# Altium PCB f3.PcbDoc (part 2 of 2)
Units mm, origin at the board's own origin, x right, y up, seen from the top; angles counter-clockwise.
Board outline 43.2 x 39.9 mm, 6 copper layers (Top Layer, layer 2, flex top, flex bottom, layer 5, Bottom Layer), stack 1.565 mm thick; 123 components, 105 nets, 511 pads, 153 vias.
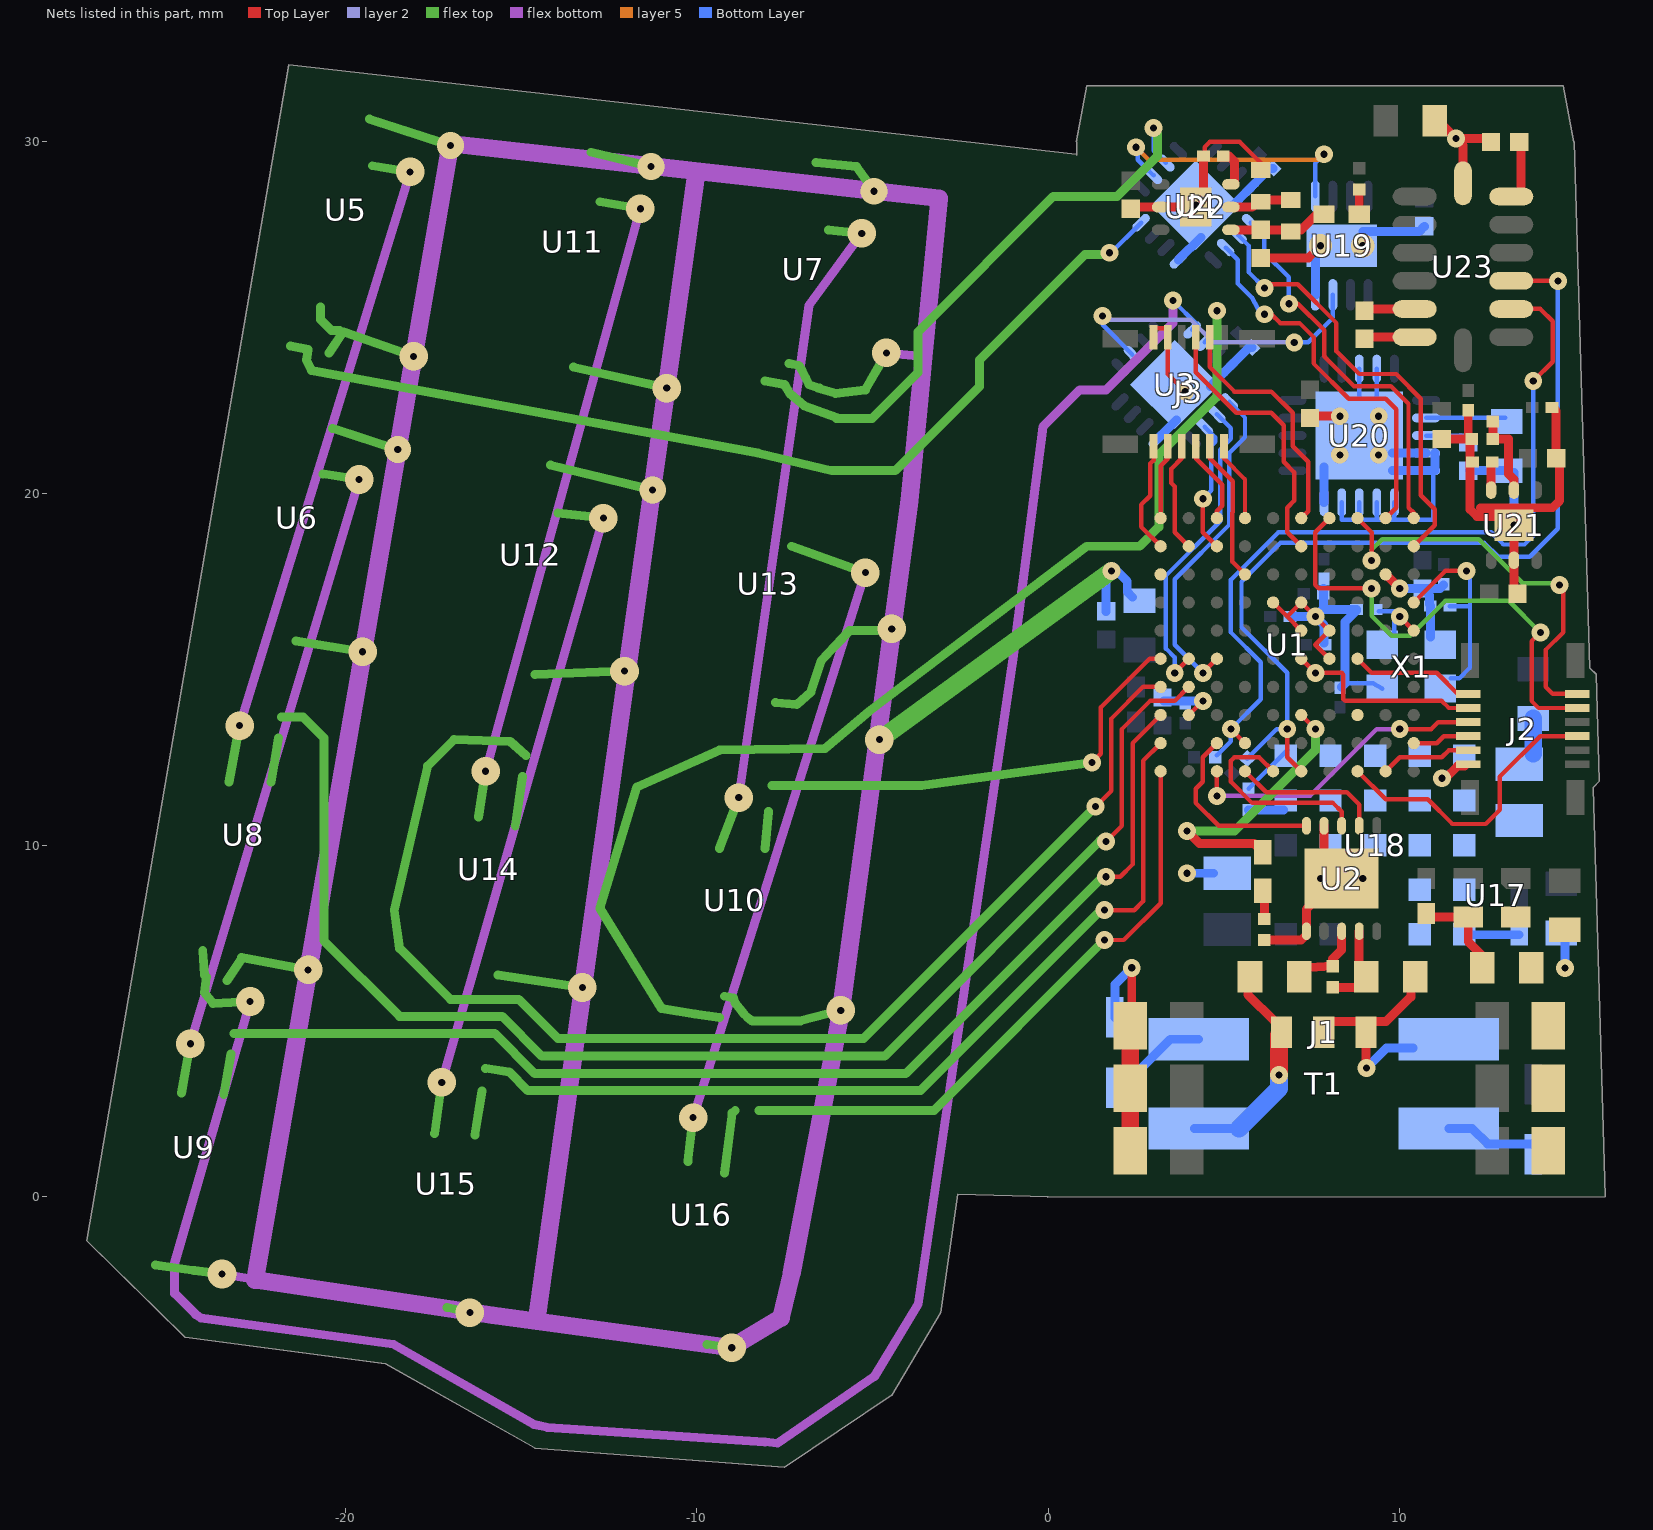
[diagram p6: the nets of this part, all layers, seen from the top]

## Via types
v1: diameter 0.508, hole 0.203, Top Layer to Bottom Layer, tented both sides, 86 vias
v2: diameter 0.813, hole 0.203, Top Layer to Bottom Layer, tented both sides, 51 vias
v3: diameter 0.762, hole 0.203, Top Layer to Bottom Layer, tented both sides, 5 vias
v4: diameter 0.66, hole 0.203, Top Layer to Bottom Layer, tented both sides, 4 vias
v5: diameter 0.5, hole 0.203, Top Layer to Bottom Layer, tented top, 4 vias
v6: diameter 1.016, hole 0.381, Top Layer to Bottom Layer, tented both sides, 2 vias
v7: diameter 0.508, hole 0.203, Top Layer to Bottom Layer, tented bottom, 1 vias

## Nets (pads, with @x,y where several pads share a name; then routed paths per layer and width w, separated by ;. In a path a pad name is that pad's centre, name@x,y a point inside that pad or via, vN(x,y) a via of type N, cw(c..) or ccw(c..) an arc to the next point about the centre after c; other vN are vias at no path point) (continued)
GND: C3.1 C4.1 C5.1 C6.1 C7.1 C8.1 C9.2 C10.2 C11.2 C12.1 C13.1 C14.1 C15.1 C16.1 C17.1 C18.1 C19.1 C20.1 C21.1 C22.1 C23.1 C24.1 C26.1 C27.1 C28.1 C29.2 C30.1 C31.1 C32.1 C33.1 C34.1 C35.1 C36.1 C37.1 C38.1 C39.1 C40.1 C41.1 C42.1 C43.1 C44.1 C45.1 C46.1 C47.1 C50.1 C51.1 C52.1 C53.1 C55.1 D2.1 J2.11 J3.2 J3.4 R1.2 R2.2 R3.2 R5.2 R7.2 R9.2 R10.2 R11.2 R12.2 R14.2 R16.2 R18.2 R20.2 R22.1 R23.1 R28.1 R29.1 R30.1 R31.1 R35.1 U1.B3 U1.D5 U1.D6 U1.E4 U1.E5 U1.F4 U1.J8 U2.4 U2.6 U2.11 U3.1 U3.12 U3.PAD U4.1 U4.12 U4.PAD U17.4 U18.C2 U18.D1 U18.D2 U18.D3 U18.D4 U18.D5 U18.E2 U18.E3 U18.E4 U18.E5 U19.4 U19.9 U20.4 U20.5 U20.6 U20.7 U20.8 U20.9 U20.10 U20.18 U20.19 U20.21 U21.2 U21.7 U22.2 U22.7 U23.7 X1.2 X1.4 | length 258.1
  Top Layer w0.127: J3.2@3,24.45 3,24.7 J3.4@3.4,24.7 ; J3.4@3.4,24.215 3.4,23.4 v1(3.9,22.9) ; U1.J8@4,13.7 v1(4.4,14.1) ; C19.1@4.45,29.65 4.45,29.85 4.6,30 5.45,30 6.05,29.4 R22.1@6.05,29.2 ; U1.F4@6.4,16.9 6.8,16.5 ; U1.E5@7.2,16.1 6.8,16.5 ; U1.D6@8,15.3 7.6,15.7 U1.D5@8,16.1 v1(7.6,16.5) U1.E4@7.2,16.9 6.8,16.5
  Top Layer w0.254: C5.1@2.379,5.239 v1(2.379,6.509) ; C18.1@2.45,28.05 2.55,28.15 U22.2@3.2,28.15 U22.7@4.2,28.15 ; U22.7@4.42,28.47 C19.1@4.42,29.6 ; C20.1@6.05,26.7 7.4,26.7 v4(7.75,27.05) ; R23.1@6.15,7.3 7.2,7.3 U2.6@7.35,7.45 ; U2.6@7.348,7.549 7.348,8.176 U2.11@7.586,8.414 ; C17.1@7.5,22.2 v5(8.3,22.2) ; U2.11@7.848,9.648 U2.4@7.848,10.549 ; U1.B3@9.6,17.7 v1(10,17.3) ; v1(11.2,11.9) 11.3,11.9 11.65,12.25 J2.11@11.85,12.25 ; C53.1@11.2,30.5 v1(11.6,30.1) ; C31.1@11.3,21.55 R35.1@11.95,21.55 ; U23.7@11.8,28.825 11.8,29.9 v1(11.6,30.1) ; C35.1@11.95,22.37 R35.1@11.95,21.55 ; R35.1@12.05,21.55 R35.1@12,21.55 ; 12.304,19.596 14.346,19.596 14.55,19.8 14.55,20.9 C34.1@14.45,21 ; C24.1@12.55,30.1 v1(11.6,30.1) ; U21.7@13,19.35 12.2,19.35 12,19.55 R35.1@12,21.55 ; U21.7@13.25,19.15 v1(13.25,19.1) U21.2@13.25,18.1 13.25,17.25 C32.1@13.35,17.15 ; C26.1@14.33,22.45 14.35,22.45 14.45,22.35 C34.1@14.45,21.05 ; R35.1@11.95,21.55 R35.1@12,21.55
  Top Layer w0.5: C4.1@2.341,1.302 C3.1@2.341,3.08 C5.1@2.341,4.858
  flex bottom w0.254: v2(-23.5,-2.2) -22.6,-2.35 ; v2(-4.6,24) -3.55,23.9
  flex bottom w0.508: -22.56,-2.367 -15.804,-3.374 v2(-9,-4.3) ; -22.55,-2.35 -21.038,6.448 -19.483,15.497 -18.495,21.249 -18.04,23.898 -17.988,24.198 v3@-17.008,29.901 ; v3@-16.994,29.949 -11.298,29.314 -4.949,28.606 -3.1,28.4 -3.541,23.899 -3.688,22.399 -3.942,19.804 -4.4,16.4 -4.762,13.702 -4.876,12.853 -5.891,5.299 -7.3,-2.2 -7.6,-3.45 v2@-8.95,-4.25 ; -14.55,-3.5 -13.233,5.948 -12.042,14.499 -11.98,14.94 -11.261,20.102 -10.857,23.001 -10.85,23.05 -10,29.15
  flex top w0.254: C37.1@-25.397,-1.946 -24.347,-2.093 R7.2@-24.3,-2.1 ; R7.2@-24.281,-2.098 v2(-23.5,-2.2) ; R28.1@-23.354,6.153 R5.2@-22.95,6.75 ; R5.2@-22.947,6.804 v2(-21.05,6.45) ; R2.2@-21.397,15.804 v2(-19.5,15.5) ; C36.1@-20.704,25.303 -20.704,24.954 -20.39,24.64 R1.2@-20.15,24.64 ; R30.1@-20.454,24.003 -20.063,24.581 -20.05,24.6 -20.048,24.6 v2(-18.05,23.9) ; C44.1@-20.354,21.853 v3(-18.5,21.25) ; C43.1@-19.304,30.653 v3(-17,29.9) ; R16.2@-17.1,-3.15 v2(-16.45,-3.3) ; R14.2@-15.65,6.3 v2(-13.25,5.95) ; R11.2@-14.6,14.85 v2(-12.05,14.95) ; C46.1@-14.153,20.808 v3(-11.25,20.1) ; R10.2@-13.501,23.595 v2(-10.85,23) ; C45.1@-13.003,29.708 v3(-11.3,29.3) ; R18.2@-9.7,-4.2 v2(-9,-4.3) ; R29.1@-9.2,5.701 -8.95,5.65 -8.895,5.5 R9.2@-8.65,5.2 ; R9.2@-8.55,5.1 -8.411,4.989 ; -8.4,5 -7.05,5 v2(-5.9,5.3) ; R12.2@-7.75,14.05 -7.15,14 -6.75,14.35 -6.45,15.25 -5.65,16.1 -4.8,16.1 v2(-4.45,16.15) ; R31.1@-7.369,23.698 -7.1,23.65 -7,23.5 -6.9,23.3 -6.8,23.1 R3.2@-6.5,23 ; C47.1@-6.602,29.419 -5.45,29.3 v3(-4.95,28.6) ; R3.2@-6.55,23 -6.05,22.85 -5.2,22.95 v2(-4.6,24)
  flex top w0.508: v2(-4.8,13) v1(1.8,17.8)
  Bottom Layer w0.127: U20.9@8.35,19.75 8.35,19.25 8.85,19.25 ; C40.1@8.45,14.6 9.25,14.6 X1.2@9.5,14.45 ; U20.8@8.85,19.75 8.85,19.25 ; U20.21@8.85,22.7 U20.18@8.85,23.55 ; 9.35,19.3 U20.7@9.35,19.75 ; U20.21@9.35,22.75 U20.19@9.35,23.55 ; 9.85,19.25 U20.6@9.85,19.75 ; U20.5@10.95,20.6 10.95,19.25 8.85,19.25
  Bottom Layer w0.254: C51.1@1.65,16.65 1.65,17.65 v1(1.8,17.8) 1.95,17.8 2.25,17.5 2.25,17.2 C50.1@2.4,17.05 ; D2.1@1.9,5.096 1.9,6.03 v1(2.379,6.509) ; U3.1@3.105,21.544 U3.PAD@3.65,22.089 ; C23.1@3.3,14.1 v1(4.4,14.1) ; U4.1@3.705,26.644 U4.PAD@4.35,27.289 ; v1(3.95,9.2) C9.2@4.7,9.2 ; U3.PAD@4.611,23.05 U3.12@5.156,23.595 5.711,24.15 C14.1@5.8,24.15 ; U4.PAD@5.161,28.1 U4.12@5.756,28.695 6.311,29.25 C15.1@6.4,29.25 ; R20.2@5.7,11 U18.D1@6.7,11 ; C22.1@6.88,16.5 v1(7.6,16.5) 7.85,16.25 C11.2@7.85,15.75 ; U19.4@7.6,25.65 U19.9@7.6,26.9 ; v1@7.65,16.55 7.8,16.7 C28.1@8.77,16.7 8.77,16.67 8.45,16.35 8.45,14.6 C40.1@8.35,14.5 ; 7.83,16.73 C21.1@7.83,17.3 ; U20.10@7.85,19.75 U20.21@7.85,20.75 ; U19.9@8.95,27.45 10.55,27.45 C29.2@10.7,27.6 ; U20.21@9.8,20.65 U20.5@10.75,20.65 11,20.65 U20.4@11,21.15 ; U20.21@9.8,21.15 U20.4@10.75,21.15 ; v1(10,17.3) C38.1@10.65,17.3 ; C27.1@10.85,16.85 10.85,17.1 C38.1@10.65,17.3 ; X1.4@10.87,15.92 C27.1@10.87,16.8 ; C39.1@11.25,17.4 11.15,17.3 C38.1@10.65,17.3 ; C30.1@12,20.65 C16.1@13.05,20.65 ; v1(13.25,19.1) C16.1@13.25,20.6 ; v1(14.7,6.5) C55.1@14.7,7.4
  Bottom Layer w0.508: C10.2@13.8,12.6 C52.1@13.8,13.6
  other v4: 7.748,9.049 8.948,9.049 8.95,27.05
  other v5: 8.3,21.1 9.4,21.1 9.4,22.2
  other v7: 4.2,28.2
I2C_SCL: R33.1 U1.G9 U23.2 | length 23.1
  Top Layer w0.127: v1(5.2,13.3) U1.G9@5.6,12.9 ; U23.2@13.6,25.25 14,25.25 14.35,24.9 14.35,23.75 v1(13.8,23.2)
  Bottom Layer w0.127: R33.1@4.8,12.55 5.2,12.95 v1(5.2,13.3) 6.05,14.15 6.05,15.2 5.2,16.05 5.2,17.55 6.55,18.9 12.6,18.9 12.95,18.55 13.55,18.55 13.8,18.8 v1(13.8,23.2) v1@13.85,23.25
I2C_SDA: R32.1 U1.E10 U23.3 | length 25.6
  Top Layer w0.127: v1(6.8,13.3) 6.8,12.5 U1.E10@7.2,12.1 ; U23.3@13.45,26.05 v1(14.5,26.05)
  Bottom Layer w0.127: R32.1@5.662,12.462 6.5,13.3 v1(6.8,13.3) 6.8,14.9 5.5,16.2 5.5,17.491 6.609,18.6 12.4,18.6 12.8,18.2 13.7,18.2 14.5,19 v1(14.5,26.05)
INPUT_NEG: C2.1 J1.2 J1.3 T1.1 | length 5.9
  Top Layer w0.254: J1.2@7.783,4.985 J1.3@8.983,4.985 ; J1.3@9.04,4.673 9.04,3.658 v1(9.053,3.658) ; J1.3@9.11,4.985 9.618,4.985 10.318,5.685 C2.1@10.318,6.255
  Bottom Layer w0.254: v1(9.053,3.658) 9.618,4.223 T1.1@10.38,4.223
INPUT_POS: C1.1 J1.1 T1.3 | length 6.1
  Top Layer w0.254: C1.1@5.681,6.255 5.681,5.747 6.443,4.985 J1.1@6.57,4.985
  Top Layer w0.508: v1(6.57,3.461) J1.1@6.57,4.603
  Bottom Layer w0.254: T1.3@4.157,1.937 T1.3@4.284,1.937 T1.3@5.427,1.937
  Bottom Layer w0.508: T1.3@5.427,1.937 6.57,3.08 v1(6.57,3.461)
LEDS_0: R4.1 U1.J7 | length 39.1
  Top Layer w0.127: v1(1.65,10.1) 2.1,10.55 2.1,13.3 2.9,14.1 3.6,14.1 U1.J7@4,14.5
  flex top w0.254: R4.1@-21.803,13.646 -21.196,13.646 -20.6,13.05 -20.6,7.279 -18.45,5.129 -15.529,5.129 -14.4,4 -4.65,4 1.475,10.125 v1@1.625,10.125
LEDS_1: R6.1 U1.K8 | length 33
  Top Layer w0.127: v1(1.65,9.1) 2.05,9.1 2.4,9.45 2.4,12.9 U1.K8@3.2,13.7
  flex top w0.254: R6.1@-23.153,4.646 -15.746,4.646 -14.6,3.5 -4.3,3.5 ; -4.267,3.5 -4.05,3.5 1.55,9.1 v1(1.65,9.1)
LEDS_2: R8.1 U1.K6 | length 13.1
  Top Layer w0.127: v1(1.25,12.35) 1.5,12.6 1.5,13.916 2.884,15.3 U1.K6@3.2,15.3
  flex top w0.254: R8.1@-7.85,11.7 -3.6,11.7 v1(1.25,12.35)
LEDS_3: R13.1 U1.K7 | length 36.6
  Top Layer w0.127: v1(1.35,11.1) 1.8,11.55 1.8,13.6 2.7,14.5 U1.K7@3.2,14.5
  flex top w0.254: R13.1@-14.85,12.55 -15.3,12.95 -16.9,13 -17.65,12.25 -18.6,8.15 -18.45,7.062 -17,5.612 -15.062,5.612 -13.95,4.5 -5.25,4.5 v1(1.35,11.1)
LEDS_4: R15.1 U1.K9 | length 25.9
  Top Layer w0.127: v1(1.6,8.15) 2.45,8.15 2.7,8.4 2.7,12.4 U1.K9@3.2,12.9
  flex top w0.254: R15.1@-16,3.65 -15.33,3.547 -14.8,3.017 -3.633,3.017 1.5,8.15 v1(1.6,8.15)
LEDS_5: R17.1 U1.K10 | length 17.6
  Top Layer w0.127: v1(1.6,7.3) 2.15,7.3 3.2,8.35 U1.K10@3.2,12.1
  flex top w0.254: R17.1@-8.219,2.448 -3.252,2.448 v1(1.6,7.3)
MUX0_A0: U1.H2 U3.15 | length 3.8
  Top Layer w0.127: v1(4.4,19.85) 4.4,18.9 U1.H2@4.8,18.5
  Bottom Layer w0.127: v1(4.4,19.85) 4.638,20.088 4.638,21.356 4.75,21.468 4.75,21.596 U3.15@4.449,21.898
MUX0_A1: U1.J6 U3.14 | length 9
  Top Layer w0.127: v1(3.6,14.9) U1.J6@4,15.3
  Bottom Layer w0.127: v1(3.6,14.9) 3.595,14.905 3.595,15.345 3.35,15.591 3.35,17.668 4.892,19.21 4.892,21.251 5.2,21.559 5.2,21.854 U3.14@4.802,22.251
MUX0_A2: U1.H6 U3.13 | length 9.6
  Top Layer w0.127: v1(4.4,14.9) U1.H6@4.8,15.3
  Bottom Layer w0.127: v1(4.4,14.9) 3.604,15.696 3.604,17.563 5.146,19.105 5.146,21.146 5.6,21.6 5.6,22.161 U3.13@5.156,22.605
MUX0_OUT: U3.6 U19.3 | length 9.1
  layer 2 w0.127: v1@1.65,24.95 4.05,24.95 4.7,24.3 v1(7,24.3)
  Bottom Layer w0.127: v1(1.55,25.05) 1.55,24.8 U3.6@2.398,23.949 ; v1(7,24.3) 7.4,24.3 8.1,25 U19.3@8.1,25.65
MUX1_A0: U1.B1 U4.15 | length 10.8
  Top Layer w0.127: v1(6.15,25.1) 6.35,25.1 6.6,24.85 7.15,24.85 7.55,24.45 7.55,23.7 8.55,22.7 9.6,22.7 9.9,22.4 9.9,19.6 U1.B1@9.6,19.3
  Bottom Layer w0.127: U4.15@5.049,26.998 5.396,26.65 5.396,25.975 5.8,25.571 v1@6.05,25.1
MUX1_A1: U1.A2 U4.14 | length 12.7
  Top Layer w0.127: v1(6.15,25.85) 6.25,25.95 7.1,25.95 8.2,24.85 8.2,24.05 8.85,23.4 9.9,23.4 10.6,22.7 10.6,19.95 11,19.55 11,19.1 U1.A2@10.4,18.5
  Bottom Layer w0.127: U4.14@5.402,27.351 5.7,27.054 5.7,26.3 v1(6.15,25.85)
MUX1_A2: U1.A1 U4.13 | length 11.1
  Top Layer w0.127: v1(6.85,25.4) 7.1,25.4 7.85,24.65 7.85,23.9 8.7,23.05 9.75,23.05 10.25,22.55 10.25,19.6 10.4,19.45 U1.A1@10.4,19.3
  Bottom Layer w0.127: U4.13@5.756,27.705 6.15,27.311 6.15,26.85 6.85,26.15 v1(6.85,25.4)
MUX1_OUT: U4.6 U19.5 | length 7.9
  layer 5 w0.127: v1(2.5,29.85) 2.85,29.5 7.7,29.5 v1(7.85,29.65)
  Bottom Layer w0.127: v1(2.5,29.85) 2.55,29.85 2.55,29.496 U4.6@2.998,29.049 ; U19.5@7.6,28.45 7.6,29.4 v1(7.85,29.65)
NetC10_1: C10.1 L3.1 U18.A4 U18.A5 U18.B4 U18.B5 U18.C3 U18.C4 U18.C5 | length 1.3
  Bottom Layer w0.254: U18.A5@12.05,7.45 L3.1@13.4,7.45
NetC12_2: C12.2 L2.1 U17.3 | length 2.8
  Top Layer w0.254: L2.1@10.701,7.949 U17.3@11.951,7.949 ; U17.3@11.95,7.9 11.95,7.25 12.347,6.853 C12.2@12.347,6.509
NetC16_2: C16.2 U20.2 | length 2.2
  Bottom Layer w0.127: U20.2@10.75,22.15 C16.2@13,22.15
NetC19_2: C19.2 U22.6 | length 1
  Top Layer w0.254: C19.2@4.98,29.6 5.15,29.6 5.3,29.45 U22.6@5.3,28.8
NetC20_2: C20.2 L4.1 R21.2 U22.4 | length 2.7
  Top Layer w0.254: U22.4@5.2,27.5 7.2,27.5 L4.1@7.7,28
NetC24_2: C24.2 U23.6 | length 1.8
  Top Layer w0.254: U23.6@13.175,28.45 13.45,28.45 C24.2@13.45,30
NetC25_1: C25.1 U23.12 | length 1.3
  Top Layer w0.254: C25.1@9.1,25.25 U23.12@10.425,25.25
NetC25_2: C25.2 U23.13 | length 1.4
  Top Layer w0.254: C25.2@9,24.45 U23.13@10.425,24.45
NetC30_2: C30.2 U20.3 | length 1.2
  Bottom Layer w0.127: U20.3@10.75,21.65 11.75,21.65 C30.2@11.9,21.5
NetC33_2: C33.2 U21.6 | length 0.8
  Top Layer w0.254: U21.6@12.6,20.1 C33.2@12.6,20.9
NetD1_1: D1.1 T1.4 | length 2.6
  Bottom Layer w0.254: T1.4@11.396,1.937 12.063,1.937 12.5,1.5 D1.1@13.8,1.5
NetD2_2: D2.2 T1.2 | length 2.9
  Bottom Layer w0.254: D2.2@2,3 3.477,4.477 T1.2@4.284,4.477
NetD3_2: D3.2 R23.2 | length 0.7
  Top Layer w0.254: R23.2@6.15,7.9 D3.2@6.15,8.6
NetL4_2: L4.2 R36.1 | length 0.6
  Top Layer w0.254: L4.2@8.85,28 R36.1@8.85,28.65
NetR4_2: R4.2 U8.K | length 1.3
  flex top w0.254: U8.K@-22.1,11.8 R4.2@-21.897,13.054
NetR6_2: R6.2 U9.K | length 1.2
  flex top w0.254: U9.K@-23.45,2.9 R6.2@-23.247,4.054
NetR8_2: R8.2 U10.K | length 1.1
  flex top w0.254: U10.K@-8.05,9.9 R8.2@-7.95,10.95
NetR13_2: R13.2 U14.K | length 1.4
  flex top w0.254: U14.K@-15.158,10.547 R13.2@-14.95,11.95
NetR15_2: R15.2 U15.K | length 1.3
  flex top w0.254: U15.K@-16.308,1.747 R15.2@-16.1,3
NetR17_2: R17.2 U16.K | length 1.8
  flex top w0.254: U16.K@-9.211,0.667 -8.987,2.383 R17.2@-8.9,2.45
NetR20_1: R20.1 U18.E1 | length 1.6
  Bottom Layer w0.127: R20.1@5.7,11.6 U18.E1@6.8,12.7
NetR21_1: R21.1 R22.2 U22.5 | length 1.9
  Top Layer w0.254: U22.5@5.2,28.15 5.8,28.15 6,28.35 6.95,28.35 R21.1@7,28.35
NetR34_1: R34.1 R35.2 U21.5 | length 2.5
  Top Layer w0.254: R34.1@12.65,22.05 R35.2@12.65,21.55 13.1,21.55 13.1,20.55 13.25,20.4 U21.5@13.25,20.1
NetU5_K: U5.K U8.A | length 19.2
  flex bottom w0.254: v2(-23,13.4) v2(-18.15,29.15)
  flex top w0.254: U8.A@-23.3,11.8 v2(-23,13.4) ; U5.K@-19.226,29.324 v2(-18.15,29.15)
NetU6_K: U6.K U9.A | length 19.2
  flex bottom w0.254: v2(-24.4,4.35) v2(-19.6,20.4)
  flex top w0.254: U9.A@-24.65,2.95 v2(-24.4,4.35) ; U6.K@-20.623,20.561 v2(-19.6,20.4)
NetU7_K: U7.K U10.A | length 19.2
  flex bottom w0.254: v2(-8.8,11.35) -6.8,25.35 v2(-5.3,27.4)
  flex top w0.254: U10.A@-9.35,9.9 v2(-8.8,11.35) ; U7.K@-6.25,27.5 v2(-5.3,27.4)
NetU11_K: U11.K U14.A | length 19.1
  flex bottom w0.254: v2(-16,12.1) v2(-11.6,28.1)
  flex top w0.254: U14.A@-16.2,10.8 v2(-16,12.1) ; U11.K@-12.75,28.3 v2(-11.6,28.1)
NetU12_K: U12.K U15.A | length 19.5
  flex bottom w0.254: v2(-17.25,3.25) v2(-12.65,19.3)
  flex top w0.254: U15.A@-17.45,1.8 v2(-17.25,3.25) ; U12.K@-13.95,19.45 v2(-12.65,19.3)
NetU13_K: U13.K U16.A | length 19.7
  flex bottom w0.254: v2(-10.1,2.25) v2(-5.2,17.75)
  flex top w0.254: U16.A@-10.25,1 v2(-10.1,2.25) ; U13.K@-7.3,18.5 v2(-5.2,17.75)
NRST: J2.3 U1.E6 | length 5.8
  Top Layer w0.127: U1.E6@7.2,15.3 v1(7.6,14.9) 8.35,14.9 8.4,14.85 8.4,14.15 8.45,14.1 11.2,14.1 11.4,13.9 J2.3@12,13.9
PA0: J2.8 U1.C10 | length 8.2
  Top Layer w0.127: U1.C10@8.8,12.1 9.6,11.3 10.8,11.3 11.5,10.6 12.45,10.6 12.85,11 12.85,11.95 14,13.1 J2.8@14.815,13.1
PA1: U1.C8
PA15: J3.9 U1.G3 | length 4.3
  Top Layer w0.127: J3.9@4.6,21.585 4.6,21 5.25,20.35 5.25,19.467 5.234,19.451 5.234,18.066 U1.G3@5.6,17.7
PA17: J3.10 U1.E1 | length 6.8
  Top Layer w0.127: J3.10@4.6,24.215 4.6,23.6 5.3,22.9 6.35,22.9 6.954,22.296 6.954,21.346 7.4,20.9 7.4,19.5 U1.E1@7.2,19.3
PA19: J3.7 U1.H1 | length 2.7
  Top Layer w0.127: J3.7@4.2,21.585 4.2,21 4.95,20.25 4.95,19.65 4.8,19.5 U1.H1@4.8,19.3
PC0/PWML0: J3.5 U1.J2 | length 3.4
  Top Layer w0.127: J3.5@3.8,21.585 3.8,21 3.5,20.7 3.5,20.3 3.6,20.2 3.6,18.9 U1.J2@4,18.5
PC12/AD12: U1.K3
PC13/AD10: J3.1 U1.K2 | length 3.5
  Top Layer w0.127: J3.1@3,21.585 3,20.95 2.904,20.854 2.904,19.941 2.65,19.687 2.65,19.05 U1.K2@3.2,18.5
PC31: J3.8 U1.E2 | length 7.7
  Top Layer w0.127: J3.8@4.2,24.215 4.2,23.45 5.35,22.3 6.346,22.3 6.7,21.946 6.7,20.9 7,20.6 7,19.8 6.8,19.6 6.8,18.9 U1.E2@7.2,18.5
RS485_A: C1.2 R19.1 U2.8 | length 1.9
  Top Layer w0.254: C1.2@7.205,6.509 R19.1@8.094,6.555 ; R19.1@8.094,6.636 8.094,6.763 8.348,7.017 U2.8@8.348,7.549
RS485_B: C2.2 R19.2 U2.9 | length 2.1
  Top Layer w0.254: R19.2@8.094,5.955 C2.2@9.064,5.955 ; C2.2@8.848,6.39 U2.9@8.848,7.549
RS485_DE: U1.F10 U2.3 | length 5.9
  Top Layer w0.127: U1.F10@6.4,12.1 6,12.5 5.3,12.5 5.2,12.4 5.2,11.8 5.8,11.2 8.1,11.2 8.348,10.952 U2.3@8.348,10.549
RS485_DI: U1.H9 U2.5 | length 5.4
  Top Layer w0.127: U1.H9@4.8,12.9 4.4,12.5 4.4,11.8 4.2,11.6 4.2,11.2 4.851,10.549 U2.5@7.348,10.549
RS485_RO: U1.G10 U2.2 | length 4.2
  Top Layer w0.127: U1.G10@5.6,12.1 6.2,11.5 8.5,11.5 8.848,11.152 U2.2@8.848,10.549
RXD1: J3.11 U1.G1 | length 2.5
  Top Layer w0.127: J3.11@5,21.585 5,21 5.6,20.4 U1.G1@5.6,19.3
STATUS_LED: D3.1 U1.E8 | length 8.2
  Top Layer w0.127: U1.E8@7.2,13.7 v1(7.6,13.3)
  Top Layer w0.254: v1(3.95,10.4) 4.3,10.05 5.85,10.05 D3.1@6.1,9.8
  flex top w0.254: v1(3.95,10.4) 5.3,10.4 7.6,12.7 v1(7.6,13.3)
TCLK: J2.1 U1.C6 | length 3.5
  Top Layer w0.127: U1.C6@8.8,15.3 9.2,14.9 11.05,14.9 11.65,14.3 J2.1@11.9,14.3
TDI: J2.5 U1.H10 | length 8.7
  Top Layer w0.127: v1(4.8,11.4) U1.H10@4.8,12.1 ; v1(10,13.3) 10.9,13.3 11.1,13.5 J2.5@11.9,13.5
  flex bottom w0.127: v1(4.8,11.4) 7.45,11.4 9.35,13.3 v1(10,13.3)
TDO: J2.9 U1.B10 | length 2.5
  Top Layer w0.127: U1.B10@9.6,12.1 10,12.5 11.2,12.5 11.4,12.7 J2.9@11.9,12.7
TEMP_0: R24.2 R28.2 U3.9 | length 67
  flex bottom w0.254: v2(-22.7,5.55) -24.85,-1.9 -24.85,-2.75 -24.25,-3.35 -24.102,-3.452 -18.626,-4.199 -14.62,-6.479 -14.249,-6.563 -8.05,-6.973 -7.7,-7.015 -4.938,-5.112 -3.694,-3.053 -1,15.3 -0.15,21.9 0.9,22.95 1.65,22.95 3.55,24.85 v1(3.55,25.489) v1@3.55,25.5
  flex top w0.254: R24.2@-24.047,7.004 R28.2@-24,6.3 ; R28.2@-23.946,6.247 -24,5.8 -23.75,5.5 v2(-22.7,5.55)
  Bottom Layer w0.127: v1(3.55,25.489) 4.239,24.8 U3.9@4.095,24.656
TEMP_1: R25.2 R29.2 U3.10 | length 33.7
  flex top w0.254: R29.2@-9.35,5.1 -10.05,5.2 -11,5.35 -12.75,8.2 -11.7,11.65 -9.35,12.7 -6.35,12.75 -5.1,13.8 1.1,18.5 2.6,18.5 3.15,19.05 3.15,21.1 4.8,22.75 v1@4.8,25.15
  Bottom Layer w0.127: U3.10@4.449,24.302 4.8,24.654 v1@4.8,25.15
  other v1: 4.8,25.2
TEMP_2: R26.2 R30.2 U4.4 | length 28.5
  flex top w0.254: R26.2@-21.55,24.2 R30.2@-21.046,24.097 -21.1,23.8 -20.95,23.5 -8.25,21.15 -6.15,20.65 -4.35,20.65 -1.95,23.05 -1.95,23.8 1.05,26.8 v1@1.7,26.8
  Bottom Layer w0.127: v1@1.6,26.8 1.739,26.8 U4.4@2.644,27.705
  other v1: 1.75,26.85
TEMP_3: R27.2 R31.2 U4.7 | length 17.2
  flex top w0.254: R27.2@-8.05,23.2 -7.5,23.1 -7.35,22.85 -6.95,22.5 -6,22.15 ; -6.023,22.14 -5.004,22.14 -3.7,23.445 -3.7,24.6 0.15,28.45 1.962,28.45 3.11,29.597 3.11,30.256 3.1,30.266 v1@3.1,30.4
  Bottom Layer w0.127: v1(3,30.4) 3,29.754 U4.7@3.351,29.402
TMS: J2.7 U1.A9 | length 1.7
  Top Layer w0.127: U1.A9@10.4,12.9 11.05,12.9 11.25,13.1 J2.7@12,13.1
TXD1: J3.3 U1.K1 | length 2.3
  Top Layer w0.127: U1.K1@3.2,19.4 3.2,20.791 3.4,20.991 J3.3@3.4,21.585
URXD1: J2.2 U1.C1 | length 11.9
  Top Layer w0.127: U1.C1@8.8,19.3 9.2,18.9 v1(9.2,18.1) ; v1@14.65,17.45 14.65,17.25 14.65,16.05 14.15,15.55 14.15,14.5 14.35,14.3 J2.2@15.05,14.3
  flex top w0.127: v1(9.2,18.1) 9.2,18.4 9.5,18.7 12.25,18.7 13.5,17.45 14.65,17.45 v1@14.7,17.45
  other v1: 14.55,17.4
UTXD1: J2.4 U1.D1 | length 13.6
  Top Layer w0.127: U1.D1@8,19.3 7.6,18.9 7.6,17.4 7.7,17.3 v1(9.2,17.3) ; v1(14,16.05) 13.75,15.8 13.75,14.1 13.95,13.9 J2.4@14.95,13.9
  flex top w0.127: v1(9.2,17.3) 9.2,16.528 9.774,15.954 10.304,15.954 11.3,16.95 13.1,16.95 v1(14,16.05)
XIN: C27.2 U1.A4 X1.1 | length 5.9
  Top Layer w0.127: U1.A4@10.4,16.9 11.3,17.8 v1(11.9,17.8)
  Bottom Layer w0.127: C27.2@11.43,16.8 12,16.8 ; X1.1@11.45,14.75 11.7,14.75 12,15.05 12,16.8 ; v1@12,17.8 12,16.8
XOUT: C28.2 U1.A5 X1.3 | length 1.8
  Top Layer w0.127: v1(10,16.5) U1.A5@10.4,16.1
  Bottom Layer w0.127: C28.2@9.4,16.65 9.85,16.65 v1(10,16.5) 9.85,16.35 X1.3@9.85,16
pads on no net: J2.MNT J3.MNT U1.A7 U1.A8 U1.A10 U1.B4 U1.B5 U1.B6 U1.B7 U1.B8 U1.B9 U1.C3 U1.C4 U1.C7 U1.C9 U1.D2 U1.D3 U1.D4 U1.D8 U1.D9 U1.D10 U1.E7 U1.E9 U1.F2 U1.F6 U1.F7 U1.F8 U1.F9 U1.G2 U1.G6 U1.G8 U1.H3 U1.H7 U1.H8 U1.J1 U1.J3 U1.J4 U1.J5 U1.K4 U1.K5 U2.7 U23.4 U23.5 U23.8 U23.9 U23.10 U23.11

## Polygon pours and split planes (outlines as drawn)
GND on layer 2 "layer2_gnd" (solid, pour order 4): 15.3,0.5 14.45,30.65 1.45,30.65 1.1,0.5
3V3 on layer 5 "layer5_3v3" (solid, remove dead copper, pour order 2): 15.3,0.5 14.75,19.65 1.45,19.65 1.1,0.5
4V7_ANALOG on layer 5 "layer5_4v7" (solid, pour order 3): 1.5,20.3 11.4,20.3 11.4,30.65 2.15,30.65

## Other copper
Top Layer:
  region net 5V: 15.15,8.75 11.55,8.75 11.55,9.35 11.9,9.7 13.55,9.7 14.15,10.3 15.15,10.3
  region net GND: 14.063,8.16 14.317,7.906 15.079,7.906 15.079,0.667 13.809,0.667 13.809,5.62 13.428,6.001 13.428,7.017 12.92,7.525 12.92,8.16
Bottom Layer:
  rectangle net 24V: 5.554,7.144 8.983,8.033
  region net GND: 9.8,14.1 8.95,14.1 8.7,14.35 8.2,14.35 8.2,15.2 7.8,15.6 7.8,16 7.55,16.25 6.75,16.25 6.75,16.8 7.5,16.8 7.7,17 7.7,17.6 8.35,17.6 8.65,17.3 8.65,17.05 8.9,16.8 8.9,16.55 8.65,16.3 8.65,15.15 9.1,14.7 9.8,14.7
  region net GND: 15,12.8 7.7,12.8 7.7,11.6 6.4,11.6 6.4,10.8 7.6,10.8 7.6,9.4 7.13,8.965 7.13,8.457 8.4,8.457 8.4,10.8 12.2,10.8 12.2,11.5 12.6,11.9 15,11.9
  region net NetC10_1: 10.2,7.1 10.2,9.4 9.491,9.4 9.491,10.319 12.92,10.319 13.301,10.7 13.85,10.25 12.5,8.9 12.5,7.1

## Silkscreen, mask and mechanical layers (free items; w line width, h text height)
Top Overlay:
  circle w0.127: c14.4,24.45 r0.2
  lines w0.127: 2.3,30.05 3.15,29.2 ; 5.2,8.7 5.65,8.7 5.45,8.7 ; 11.75,20.65 11.3,20.2 ; 11.85,17.7 12.2,18.05 ; 13.9,9.55 14.25,9.9 ; 5.45,8.7 5.65,9.2 5.2,9.2 5.45,8.7 ; 11.3,20.2 11.3,20.2 ; 11.3,20.2 11.3,20.2 ; 13.55,9.55 13.55,9.55
  text "B" at 2.35,7.8 h1.02
  text "SNL-4-0009 REV. A" at -2.85,5.4 h1.02 r90
Bottom Overlay:
  lines w0.127: 0.4,3.65 1,3.65 ; 0.75,3.65 0.45,4.25 1,4.25 0.75,3.7 ; 3.6,20 3.6,20.9 ; 4.2,25.55 4.2,26 ; 9.55,25.85 10.4,25 ; 11.05,23.85 12,24.8 ; 11.95,13.7 12.25,13.4 ; 15.05,2.6 14.4,2.6 14.75,2.6 ; 14.75,2.6 15.05,1.95 14.45,1.95 14.75,2.6
  lines w0.254: 5.8,6.5 6.475,7.175 ; 12.7,5.8 13.45,6.55 13.15,6.25
  text "SNL-5-0009" at 14.1,30.25 h0.64
  text "REV. A" at 14.05,29.2 h0.64
Mechanical 1:
  lines w0.127: -21.603,32.188 -27.35,-1.25 -24.55,-4 -18.85,-4.75 -14.6,-7.15 -7.5,-7.7 -4.45,-5.65 -3.05,-3.3 -2.575,0.073 0,0 ; -21.6,32.2 0.8,29.65 0,0.05 ; -0.014,-0.011 15.85,0 15.505,11.637 15.679,11.822 15.589,14.86 15.404,15.035 14.96,30.001 ; 0.8,30 1.1,31.6 14.65,31.6 14.95,30 ; 0.807,29.629 0.807,30
Mechanical 2:
  lines w0.127: -4.66,29.891 -4.926,27.197 -5.987,16.418 -7.048,5.64 -8.11,-5.138 -8.557,-9.676 ; -0.044,0.068 -2.635,0.138 -2.635,0.133 -3.316,-10.095 -3.316,-10.09 -5.929,-9.908 -8.557,-9.676 ; -0.014,0.053 15.78,0.053 ; -0.014,0.074 0.856,29.496 ; 0.61,29.565 0.858,29.565 ; 0.61,29.568 cw(c1.634,88.742) -4.66,29.895 cw(c19.317,270.731) -21.54,32.177 -28.307,-7.005 -28.307,-7.01 ccw(c19.457,271.809) -8.557,-9.681 -8.557,-9.679 -8.557,-9.677 -8.557,-9.676 ; 0.75,0.1 1.65,29.5 ; 0.871,29.578 0.871,30 ; 14.896,30 15.78,0.074
border:
  lines w0.127: -54.968,-32.985 -49.888,-32.985 ; -54.968,14.767 -49.888,14.767 ; 5.382,-128.184 5.382,-123.104 ; 5.382,57.236 5.382,62.316 ; 31.235,-123.08 31.235,-92.6 66.795,-92.6 ; 65.631,-128.184 65.631,-123.104 ; 65.631,57.236 65.631,62.316 ; 66.795,-123.08 66.795,-92.6 ; 66.795,-115.46 181.095,-115.46 ; 66.795,-107.84 181.095,-107.84 ; 66.795,-100.22 104.895,-100.22 ; 104.895,-123.08 104.895,-107.84 104.895,-92.6 ; 126.007,-128.184 126.007,-123.104 ; 126.007,57.236 126.007,62.316 ; 158.235,-123.08 158.235,-107.84 ; 181.095,-92.6 104.895,-92.6 ; 181.252,-80.534 186.332,-80.534 ; 181.252,-32.985 186.332,-32.985 ; 181.252,14.767 186.332,14.767 ; 66.795,-92.6 104.895,-92.6 ; -54.968,-128.184 -54.968,62.316 186.332,62.316 186.332,-128.184 -54.968,-128.184 ; -49.888,-123.104 181.252,-123.104 181.252,57.236 -49.888,57.236 -49.888,-123.104
  text "1" at -25.191,58.887 h1.78
  text "2" at 34.702,58.887 h1.78
  text "3" at 95.069,58.887 h1.78
  text "4" at 155.403,58.887 h1.78
  text "A" at -53.063,36.281 h1.78
  text "A" at 183.03,36.281 h1.78
  text "B" at -53.063,-11.369 h1.78
  text "B" at 183.03,-11.369 h1.78
  text "C" at -53.063,-59.02 h1.78
  text "C" at 183.03,-59.02 h1.78
  text "ENGINEER:" at 68.065,-95.14 h1.14
  text "TITLE:" at 106.165,-95.14 h1.14
  text "M. Quigley" at 69.35,-99.05 h2.54
  text "F3:  Distal Phalange" at 107.35,-99.5 h2.54
  text "PCB DESIGNER:" at 68.065,-102.633 h1.14
  text "M. Quigley" at 69.5,-106.1 h2.54
  text "Open Source" at 38.9,-106.25 h2.29
  text "D" at -53.063,-106.569 h1.78
  text "D" at 183.03,-106.569 h1.78
  text "DATE:" at 68.065,-110.38 h1.14
  text "PART NO.:" at 106.165,-110.38 h1.14
  text "REV:" at 159.505,-110.38 h1.14
  text "Robotics Foundation" at 33.6,-110.5 h2.29
  text ".PRINT_DATE" at 69.335,-113.428 h1.78
  text "A" at 160.6,-114.2 h2.54
  text "FILE NAME:" at 68.065,-118 h1.14
  text "DWG NO:" at 106.165,-118 h1.14
  text "SCALE:" at 159.505,-118 h1.14
  text ".PCB_FILE_NAME_NO_PATH" at 69.335,-121.048 h1.78
  text "none" at 160.75,-121.55 h2.54
  text "1" at -25.191,-126.533 h1.78
  text "2" at 34.702,-126.533 h1.78
  text "3" at 95.069,-126.533 h1.78
  text "4" at 155.403,-126.533 h1.78
Drill Drawing:
  text ".legend" at 48.5,-84.75 h1.52
fabrication:
  lines w0.254: -30.615,-0.739 -30.114,-0.826 ; -30.526,0.276 -30.365,-0.782 ; -29.859,0.161 -30.365,-0.782 ; -28.406,10.596 -30.365,-0.782 ; -26.574,21.239 -24.615,32.618 ; -25.121,31.674 -24.615,32.618 ; -24.865,32.661 -24.364,32.574 ; -24.453,31.559 -24.615,32.618 ; -21.354,33.008 -21.297,33.512 ; -20.353,32.811 -21.326,33.26 ; -20.278,33.484 -21.326,33.26 ; -15.576,32.618 -21.326,33.26 ; -4.675,31.402 1.074,30.76 ; 0.027,30.536 1.074,30.76 ; 0.102,31.209 1.074,30.76 ; 0.8,32.55 0.99,42.851 ; 1.046,30.508 1.103,31.012 ; 49.365,49.475 98.895,49.475
  lines w0.279: -40.976,-85.648 8.026,-85.648 ; -40.976,-80.786 8.026,-80.786 ; -42.5,-116.125 ccw(c-40.925,-116.125) -40.925,-117.7 7.975,-117.7 ccw(c7.975,-116.125) 9.55,-116.125 9.55,-76.725 ccw(c7.975,-76.725) 7.975,-75.15 -40.925,-75.15 ccw(c-40.925,-76.725) -42.5,-76.725 -42.5,-116.125
  text "NOTES: (UNLESS OTHERWISE SPECIFIED)" at 50,50.745 h1.78
  text "1.  ALL DIMENSIONS ARE IN MILLIMETERS UNLESS OTHERWISE NOTED." at 53.81,44.395 h1.78
  text "2.  FABRICATE PCB IN ACCORDANCE WITH LATEST IPC-6011 AND IPC-6013, CLASS 2." at 53.81,39.95 h1.78
  text "6 LAYER" at 2.2,37.55 h1.52
  text "2 LAYER" at -10.65,37.45 h1.52
  text "3.  MATERIALS:" at 53.81,35.505 h1.78
  text "RIGID -->" at 2.2,35.25 h1.52
  text "<--  FLEX" at -13.7,35.2 h1.52
  text "15 DEG FROM HORIZONTAL" at -21.1,34.25 h1.02 r353.53
  text "LAMINATE MATERIAL MUST BE ABLE TO WITHSTAND A LEAD FREE PROFILE." at 58.89,32.33 h1.78
  text "22.539 (mm)" at -15.397,31.934 h1.02 r353.63
  text "USE HIGH TEMP FR-4 MATERIAL OR EQUIVALENT FOR THE RIGID PORTION." at 58.89,29.155 h1.78
  text "MUST MEET UL 94V-0 FLAMMABILITY RATING." at 58.89,25.98 h1.78
  text "COPPER FOIL TO BE IN ACCORDANCE WITH IPC-MF-150, OUTER LAYER 1.0 OZ FINISHED." at 58.89,22.805 h1.78
  text "OVERALL THICKNESS TO BE .050\" +/- .005\" ON 6-LAYER RIGID PORTION" at 58.89,19.63 h1.78
  text "AND .008\" +/- .002\" ON 2-LAYER FLEX PORTION." at 58.65,16.55 h1.78
  text "4.  HOLE SIZES IN DRILL CHART ARE FINISHED DIAMETERS, AND IN INCHES." at 53.66,12.235 h1.78
  text "33.891 (mm)" at -27.712,10.734 h1.02 r80.23
  text "LAYER TO LAYER REGISTRATION SHALL BE WITHIN 0.003" at 58.74,9.06 h1.78
  text "ALL HOLES SHALL BE LOCATED WITHIN 0.003 RADIUS OF TRUE POSITION (RTP)." at 58.74,5.885 h1.78
  text "PLATED-THROUGH HOLES SHALL HAVE A TOLERANCE OF: +0.003/-0.003 FOR HOLE SIZES." at 58.74,2.71 h1.78
  text "5.  ALL PLATED-THROUGH HOLES AND CONDUCTIVE SURFACES SHALL BE PLATED WITH" at 53.66,-1.735 h1.78
  text "A MINIMUM THICKNESS OF 0.001 COPPER." at 58.74,-4.91 h1.78
  text "6.  FINISH:" at 53.66,-9.355 h1.78
  text "SURFACE FINISH TO BE ELECTROLESS NICKEL/IMMERSION GOLD PER IPC-4552." at 58.74,-12.53 h1.78
  text "NICKEL THICKNESS 120-240 MICROINCHES, GOLD THICKNESS 2.0-8.0 MICROINCHES." at 58.74,-15.705 h1.78
  text "7.  SOLDER MASK:" at 53.66,-20.15 h1.78
  text "GREEN LIQUID PHOTOIMAGEABLE (LPI) SOLDERMASK SHALL BE APPLIED TO RIGID PORTION PER" at 58.74,-23.325 h1.78
  text "LATEST PC-SM-840, CLASS H, OVER BARE COPPER (SMOBC) TO BOTH SIDES OF THE BOARD." at 58.74,-26.5 h1.78
  text "FLEX PORTION TO BE COVERED BY FLEXIBLE COVER COAT OF ANY COLOR." at 58.75,-29.65 h1.78
  text "8.  SILKSCREEN:" at 53.41,-35.495 h1.78
  text "SHALL BE APPLIED WITH WHITE NON-CONDUCTIVE PERMANENT EPOXY INK." at 58.49,-38.67 h1.78
  text "THERE SHALL BE NO SILKSCREEN ON ANY SOLDERABLE COMPONENT PAD." at 58.49,-41.845 h1.78
  text "9.  TOLERANCES:" at 53.41,-46.29 h1.78
  text "BOW AND TWIST OF THE BOARD SHALL NOT EXCEED 0.75%." at 58.49,-49.465 h1.78
  text "CONDUCTOR WIDTHS AND SPACING SHALL BE WITHIN +/-0.002 OF GERBER DATA." at 58.49,-52.64 h1.78
  text "REMOVE ALL BURRS AND BREAK SHARP EDGES 0.012 MAX." at 58.49,-55.815 h1.78
  text "FLEX PORTION OF PCB CONSISTS" at -44.2,-66.45 h2.54
  text "SOLELY OF MIDDLE TWO LAYERS" at -44.1,-70.6 h2.54
  text "Layer Stack Up Detail for: f3.PcbDoc" at -40.976,-78.885 h1.32
  text "Layer" at -40.976,-82.602 h1.12
  text "Gerber" at -21.171,-82.602 h1.12
  text "Copper" at -7.537,-82.602 h1.12
  text "Name" at -40.976,-84.838 h1.12
  text "Document" at -21.171,-84.838 h1.12
  text "Thickness" at -7.537,-84.838 h1.12
  text "Top Layer" at -40.976,-88.024 h1.57
  text "(.GTL)" at -21.171,-88.024 h1.57
  text "1.4mil" at -7.537,-88.024 h1.57
  text "layer 2" at -40.976,-92.496 h1.57
  text "(.G1)" at -21.171,-92.496 h1.57
  text "1.4mil" at -7.537,-92.496 h1.57
  text "flex top" at -40.976,-96.968 h1.57
  text "(.G2)" at -21.171,-96.968 h1.57
  text "0.7mil" at -7.537,-96.968 h1.57
  text "flex bottom" at -40.976,-101.44 h1.57
  text "(.G3)" at -21.171,-101.44 h1.57
  text "0.7mil" at -7.537,-101.44 h1.57
  text "Fabrication Drawing" at 107.2,-104.5 h2.54
  text "layer 5" at -40.976,-105.912 h1.57
  text "(.G4)" at -21.171,-105.912 h1.57
  text "1.4mil" at -7.537,-105.912 h1.57
  text "Bottom Layer" at -40.976,-110.384 h1.57
  text "(.GBL)" at -21.171,-110.384 h1.57
  text "1.4mil" at -7.537,-110.384 h1.57
  text "SNL-5-0009" at 106.95,-114.15 h2.54
  text "SNL-5-0009-FAB" at 107,-121.55 h2.54
assembly:
  lines w0.254: 49.365,49.475 98.895,49.475
  text "NOTES: (UNLESS OTHERWISE SPECIFIED)" at 50,50.745 h1.78
  text "1.  ASSEMBLE BOARD PER IPC-A-610, CLASS 2 MINIMUM USING A LEAD-FREE (ROHS) PROCESS" at 53.81,44.395 h1.78
  text "2.  INDIVIDUALLY PLACE PCA IN ANTI-STATIC BAG PER EIA-525. PROTECT IN SHIPPING" at 53.81,39.95 h1.78
  text "CONTAINER TO PREVENT DAMAGE UNDER NORMAL TRANSPORT AND HANDLING." at 58.69,36.93 h1.78
  text "3.  MATERIAL REQUIREMENTS ARE SPECIFIED ON A SEPARATE BOM. ALTERNATE" at 53.91,32.255 h1.78
  text "MATERIAL SHALL NOT BE USED UNLESS APPROVED IN WRITING." at 58.99,29.08 h1.78
  text "4.  ORIENTATION OF THE PHOTOSENSORS ON THE FLEX PORTION IS CRITICAL. ENSURE THE" at 53.96,24.905 h1.78
  text "MARKINGS ON THE BOTTOM OF THE SENSORS ALIGN WITH SILKSCREEN." at 58.84,22.03 h1.78
  text "Assembly Drawing" at 107.2,-104.5 h2.54
  text "SNL-4-0009" at 106.95,-114.15 h2.54
  text "SNL-4-0009-ASY" at 107,-121.55 h2.54

## Dimensions
15.85,0 to 17.5,31.5 on border
-0.014,-0.011 to 15.85,0 on border